# Altium PCB ToneReal_Adapter_LUT.PcbDoc
Units mm, origin at the board's own origin, x right, y up, seen from the top; angles counter-clockwise.
Board outline 83.5 x 27 mm, 2 copper layers (Top Layer, Bottom Layer); 49 components, 24 nets, 163 pads, 10 vias.
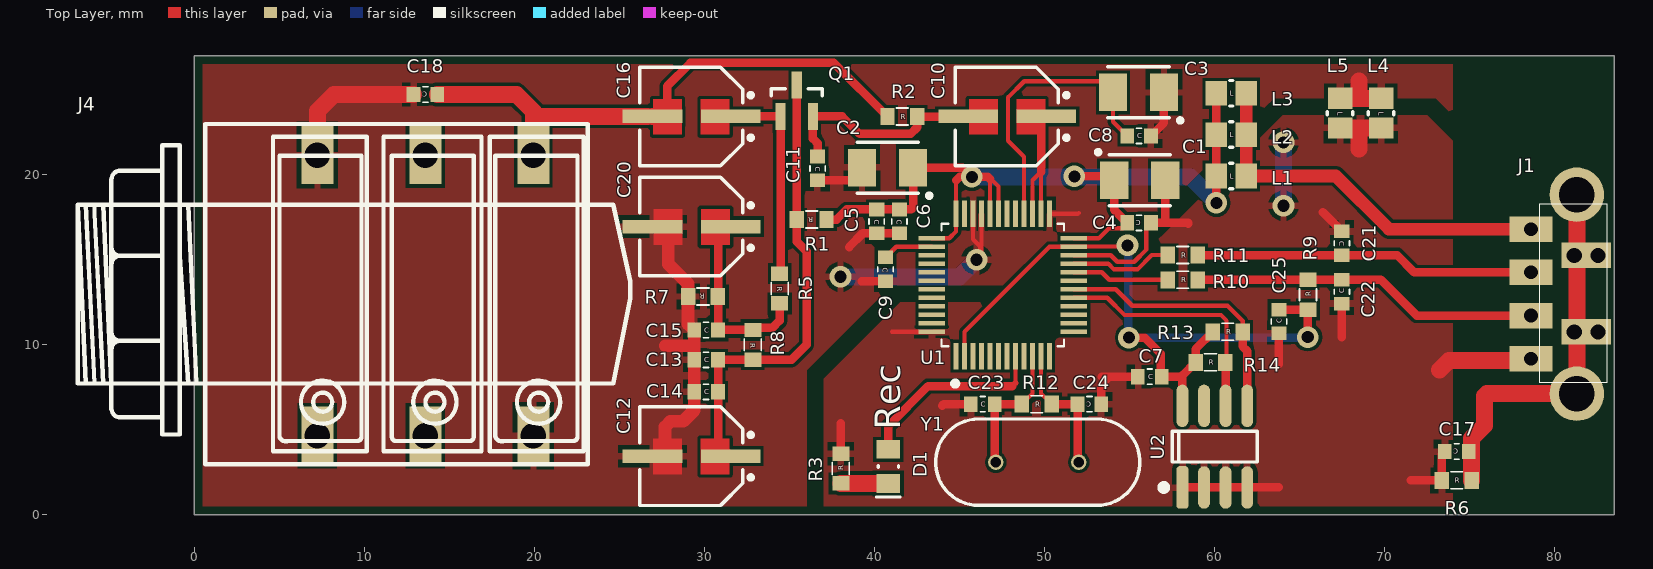
[diagram p0: Top Layer view]
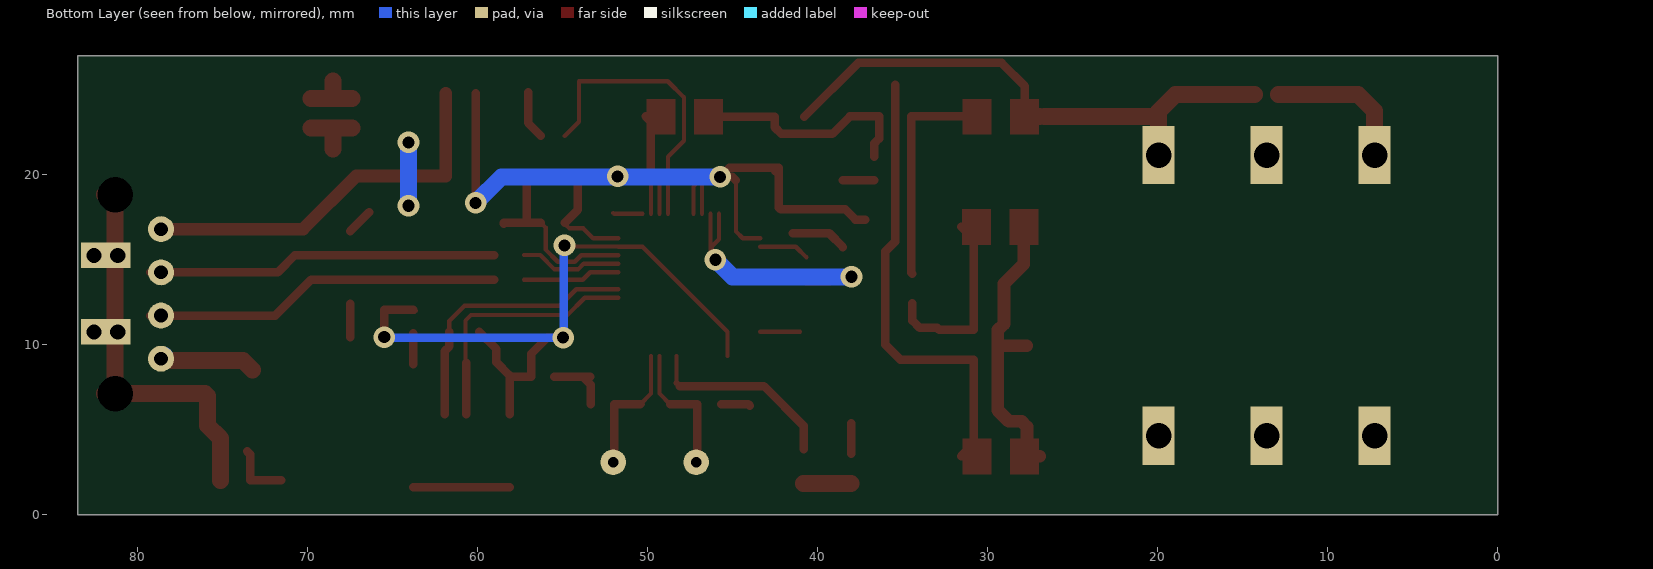
[diagram p1: Bottom Layer view, seen from below]

## Layer stack, top to bottom
Top Solder: solder mask 0.0102, Solder Resist, Dk 3.5
Top Layer: signal copper 0.0356
Dielectric1: dielectric 0.32, FR-4, Dk 4.8
Bottom Layer: signal copper 0.0356
Bottom Solder: solder mask 0.0102, Solder Resist, Dk 3.5

## Board outline
0,0 83.5,0 83.5,27 0,27

## Design rules (kind name [scope] priority, off if disabled: settings)
Clearance Clearance_1 [(IsRegion) vs (IsText)] p1: gap=0 ignorepadtopadclearanceinfootprint=FALSE
Clearance [All] p2: gap=0.2 ignorepadtopadclearanceinfootprint=FALSE except(0: Arc-Hole Track-Hole SMDPad-Hole THPad-Hole Via-Hole Fill-Hole Poly-Hole Region-Hole Text-Hole)
ComponentClearance [NOT(InComponent('J1') or InComponent('J2')) vs NOT(InComponent('J1') or InComponent('J2'))] p1: gap=0.254 collisioncheckmode=3 verticalgap=0.254 showdistances=FALSE
HoleSize [All] p1: absolutevalues=TRUE maxlimit=5 minlimit=0.025 maxpercent=80.000 minpercent=20.000
MinimumSolderMaskSliver [All] p1: minsoldermaskwidth=0.01
PlaneConnect [All] p1: planeconnectstyle=Relief reliefexpansion=0.508 reliefentries=4 reliefconductorwidth=0.4 reliefairgap=0.2
PolygonConnect [All] p1: connectstyle=Relief reliefconductorwidth=0.4 reliefentries=4 polygonreliefangle="90 Angle" airgapwidth=0.254
RoutingVias [All] p1: holewidth=0.711 width=1.27 viastyle="Through Hole" minholewidth=0.4 minwidth=0.8 maxholewidth=0.711 maxwidth=1.27
SilkToSilkClearance [All] p1: silktosilkclearance=0.054
SilkToSolderMaskClearance SilkscreenOverComponentPads [NOT(InComponent('J4'))] p1: minsilkscreentomaskgap=0.05 clearancetoexposedcopper=TRUE
SolderMaskExpansion [All] p1: expansion=0.102 istentingtop=FALSE
Width [All] p1: maxlimit=1 minlimit=0.2 preferedwidth=0.5 minimp=50.000000 maximp=50.000000 favimp=50.000000
24 further rules are at their usual default settings.

## Components (designator, comment, footprint, x,y, rotation, side; value= is the part's Value field where it differs from the comment)
C1 "10uF/16V" "TECAP SMD_B (IPC-3528)" 55.596,19.678 r0 top
C2 "10uF/16V" "TECAP SMD_B (IPC-3528)" 40.767,20.42 r180 top
C3 "10uF/16V" "TECAP SMD_B (IPC-3528)" 55.521,24.84 r180 top
C4 "?" "CERCAP SMD0603L (IPC1608L)" 55.559,17.168 r180 top
C5 "1uF" "CERCAP SMD0603L (IPC1608L)" 40.123,17.256 r270 top
C6 "100pF" "CERCAP SMD0603L (IPC1608L)" 41.463,17.256 r270 top
C7 "1uF" "CERCAP SMD0603L (IPC1608L)" 56.189,8.127 r0 top
C8 "1uF" "CERCAP SMD0603L (IPC1608L)" 55.558,22.282 r0 top
C9 "1uF" "CERCAP SMD0603L (IPC1608L)" 40.646,14.442 r270 top
C10 "1uF/50V" "ECAP SMD KVE 5.0x5.3" 47.805,23.429 r180 top
C11 "100pF" "CERCAP SMD0603L (IPC1608L)" 36.65,20.37 r270 top
C12 "47uF/6.3V" "ECAP SMD KVE 5.0x5.3" 29.244,3.451 r180 top
C13 "100pF" "CERCAP SMD0603L (IPC1608L)" 30.098,9.121 r0 top
C14 "1uF" "CERCAP SMD0603L (IPC1608L)" 30.098,7.234 r0 top
C15 "1uF" "CERCAP SMD0603L (IPC1608L)" 30.098,10.871 r0 top
C16 "4.7uF/25V" "ECAP SMD KVE 5.0x5.3" 29.244,23.429 r180 top
C17 "4.7nF" "CERCAP SMD0603L (IPC1608L)" 74.23,3.726 r180 top
C18 "100pF" "CERCAP SMD0603L (IPC1608L)" 13.592,24.718 r180 top
C20 "22uF/6.3V" "ECAP SMD KVE 5.0x5.3" 29.244,16.949 r180 top
C21 "100pF" "CERCAP SMD0603L (IPC1608L)" 67.482,15.976 r270 top
C22 "100pF" "CERCAP SMD0603L (IPC1608L)" 67.482,13.122 r90 top
C23 "20pF" "CERCAP SMD0603L (IPC1608L)" 46.358,6.51 r0 top
C24 "20pF" "CERCAP SMD0603L (IPC1608L)" 52.638,6.51 r180 top
C25 "100pF" "CERCAP SMD0603L (IPC1608L)" 63.782,11.372 r90 top
D1 "PLAY/REC" SMDLED_0805 40.81,2.85 r90 top
J1 "USB_A" USBA_1PLAG 78.599,16.8 r270 top
J4 "JACK6.3_MONO_R" JACK6.3 13.592,12.903 r90 top
L1 "BLM21PG221SN1" "BLM21P (0805 size)" 60.976,22.359 r0 top
L2 "BLM21PG221SN1" "BLM21P (0805 size)" 60.976,19.928 r0 top
L3 "BLM21PG221SN1" "BLM21P (0805 size)" 60.976,24.79 r0 top
L4 "BLM21PG221SN1" "BLM21P (0805 size)" 69.788,23.618 r270 top
L5 "BLM21PG221SN1" "BLM21P (0805 size)" 67.38,23.618 r270 top
Q1 "BC846B/BC850" SOT_23 35.426,24.354 r90 top
R1 "150" "RES smd0603 (IPC-1608)" 36.301,17.364 r180 top
R2 "680" "RES smd0603 (IPC-1608)" 41.639,23.419 r0 top
R3 "1k" "RES smd0603 (IPC-1608)" 38.016,2.725 r90 top (schematic designator R6)
R5 "100k" "RES smd0603 (IPC-1608)" 34.42,13.31 r270 top
R6 "1MOm" "RES smd0603 (IPC-1608)" 74.23,2.032 r0 top (schematic designator R4)
R7 "100k" "RES smd0603 (IPC-1608)" 29.914,12.839 r180 top
R8 "51k3" "RES smd0603 (IPC-1608)" 32.84,9.996 r270 top
R9 "1k5" "RES smd0603 (IPC-1608)" 65.492,12.947 r90 top
R10 "22" "RES smd0603 (IPC-1608)" 58.128,13.822 r0 top
R11 "22" "RES smd0603 (IPC-1608)" 58.128,15.276 r0 top
R12 "1M" "RES smd0603 (IPC-1608)" 49.538,6.51 r0 top
R13 "2k2" "RES smd0603 (IPC-1608)" 60.772,10.766 r0 top
R14 "2k2" "RES smd0603 (IPC-1608)" 59.756,8.972 r0 top
U1 "CM6327A" QFP50P900X900X160-48N 47.541,13.518 r90 top
U2 "24C02" SOIC-8 60.01,4.011 r90 top
Y1 "12MHz" "HC-49/U3H  (KX-3H)" 49.573,3.096 r180 top

## Footprints (in the part's own frame and the unit in brackets; to place one, negate y for a bottom-side part, rotate by r counter-clockwise, add the part's x,y. Pads: shape width x height; smd on the part's side, far side on the other; paste and mask are expansions set on the pad)
"BLM21P (0805 size)" [mm] "BLM21P (0805 size), 2-Leads, Body 2,0x1,3mm, IPC Medium Density"
  rect 1.25x1.45 smd: 1(-0.875,0) 2(0.875,0)
  silkscreen extent -0.1,-0.75 0.1,0.75, body extent -1,-0.63 1,0.63, height 0.85
"CERCAP SMD0603L (IPC1608L)" [mm] "Chip Capacitor, Body 1.6x0.8mm, IPC High Density"
  rect 0.8x0.9 smd: 1(-0.7,0) 2(0.7,0)
  silkscreen extent -0.15,-0.45 0.15,0.45, body extent -0.8,-0.4 0.8,0.4, height 0.9
"ECAP SMD KVE 5.0x5.3" [mm] "Alumin Capacitor, 2-Leads, Body 5.0x5.3mm, IPC Medium Density size C"
  rect 3.5x0.8 smd: 1(-2.3,0) 2(2.3,0)
  silkscreen extent -3.6,-2.9 3.05,2.9, body extent -2.77,-2.65 3.13,2.65, height 5.41
"HC-49/U3H  (KX-3H)" [mm] "QUARTZ CRYSTALS HC-49/U3H (low profile)"
  round 0.9 / inner round 1.5 / far side round 1.5 hole 0.6: 1(-2.44,0) 2(2.44,0)
  silkscreen extent -6.03,-2.54 5.98,2.54, body extent -6.08,-2.54 5.97,2.54, height 3.5
JACK6.3 [mil]
  rect 134.6x74.8 hole 59: 1(-325,250) 2(-325,0) 3(-325,-250) 4(325,250) 5(325,0) 6(325,-250)
  silkscreen extent -391,-474 397,805
QFP50P900X900X160-48N [mm]
  rect 1.56x0.28 smd: 1(-4.18,2.75) 2(-4.18,2.25) 3(-4.18,1.75) 4(-4.18,1.25) 5(-4.18,0.75) 6(-4.18,0.25) 7(-4.18,-0.25) 8(-4.18,-0.75) 9(-4.18,-1.25) 10(-4.18,-1.75) 11(-4.18,-2.25) 12(-4.18,-2.75) 25(4.18,-2.75) 26(4.18,-2.25) 27(4.18,-1.75) 28(4.18,-1.25) 29(4.18,-0.75) 30(4.18,-0.25) 31(4.18,0.25) 32(4.18,0.75) 33(4.18,1.25) 34(4.18,1.75) 35(4.18,2.25) 36(4.18,2.75)
  rect 0.28x1.56 smd: 13(-2.75,-4.18) 14(-2.25,-4.18) 15(-1.75,-4.18) 16(-1.25,-4.18) 17(-0.75,-4.18) 18(-0.25,-4.18) 19(0.25,-4.18) 20(0.75,-4.18) 21(1.25,-4.18) 22(1.75,-4.18) 23(2.25,-4.18) 24(2.75,-4.18) 37(2.75,4.18) 38(2.25,4.18) 39(1.75,4.18) 40(1.25,4.18) 41(0.75,4.18) 42(0.25,4.18) 43(-0.25,4.18) 44(-0.75,4.18) 45(-1.25,4.18) 46(-1.75,4.18) 47(-2.25,4.18) 48(-2.75,4.18)
  silkscreen extent -5.95,-3.6 3.6,3.6
"RES smd0603 (IPC-1608)" [mm] "Chip Resistor, 2-Leads, Body 1,6x0,8mm, IPC Medium Density"
  rect 0.85x1 smd: 1(-0.875,0) 2(0.875,0)
  silkscreen extent -0.35,-0.5 0.35,0.5, body extent -0.8,-0.45 0.8,0.45, height 0.5
SMDLED_0805 [mm]
  rect 1.1x1.4 smd: 1(-1,0) 2(1,0)
  silkscreen extent -1.8,-0.7 0.05,0.7, body extent -1,-0.6 1,0.65, height 0.81
SOIC-8 [mm] "MAX522,SN65HVD11DR"
  rrect50% 2.5x0.7 smd: 1(-2.4,1.905)
  oval 2.5x0.7 smd: 2(-2.4,0.635) 3(-2.4,-0.635) 4(-2.4,-1.905) 5(2.4,-1.905) 6(2.4,-0.635) 7(2.4,0.635) 8(2.4,1.905)
  silkscreen extent -2.52,-2.5 0.9,3.13, body extent -2.99,-2.44 3.01,2.46, height 1.75
SOT_23 [mm] "BC846, AZ23C5V1"
  rect 1.6x0.6 smd: 1(0.925,0) 2(-0.925,0.95) 3(-0.925,-0.95)
  silkscreen extent 0.3,-1.5 0.7,1.5, body extent -0.7,-1.5 0.7,1.5, height 1.1
"TECAP SMD_B (IPC-3528)" [mm] "Tantalium  Capacitor, 2-Leads, Body 3,5x2,8mm, IPC Medium Density"
  rect 1.65x2.2 smd: 1(-1.5,0) 2(1.5,0)
  silkscreen extent -2.57,-1.5 1.8,1.77, body extent -1.9,-1.45 1.95,1.45, height 1.95
USBA_1PLAG [mm]
  round 3.2 / inner round 1.524 / far side round 1.524 hole 2.1: 0(-2.025,2.7) 0(9.675,2.7)
  rect 1.5x2.54 / inner round 1.524 / far side round 1.524 hole 0.8: 1(0,0) 2(2.54,0) 3(5.08,0) 4(7.62,0)
  rect 1.499x1.499 hole 0.9: 7(1.549,2.548) 8(6.044,2.548) 9(1.549,3.946) 10(6.044,3.946)
  silkscreen extent -1.5,0.5 9,4.5, body extent -2.51,0.1 10.1,20.4, height 4.5

## Part data
C1 C2 C3 C4 C5 C6 C7 C8 C9 C11 C13 C14 C15 C17 C18 C21 C22 C23 C24 C25: library part "Cap Semi", "Capacitor (Semiconductor SIM Model)"
C10 C12 C16 C20: library part "Cap Pol3", "Polarized Capacitor (Surface Mount)"
D1: library part LED0, "Typical INFRARED GaAs LED"
J1: library part USB
L1 L2 L3 L4 L5: library part INDUCT
Q1: library part BC846B, "NPN Bipolar Transistor"
R1 R2 R3 R5 R6 R7 R8 R9 R10 R11 R12 R13 R14: library part RES, "Resistor"
U1: library part CM6327_1, "CM6327"
Y1: library part TSX-3225, "3225"

## Via types
v1: diameter 1.27, hole 0.711, Top Layer to Bottom Layer, 10 vias

## Nets (pads, with @x,y where several pads share a name; then routed paths per layer and width w, separated by ;. In a path a pad name is that pad's centre, name@x,y a point inside that pad or via, vN(x,y) a via of type N, cw(c..) or ccw(c..) an arc to the next point about the centre after c; other vN are vias at no path point)
AGND: C2.2 C3.1 C5.2 C6.2 C8.2 C9.2 C11.2 C12.2 C13.1 C14.1 C15.1 C18.2 C20.2 J4.3 J4.4 L4.1 L5.1 R7.2 U1.25 U1.33 U1.34 | length 53.5
  Top Layer w0.254: U1.34 45.791,16.209 46.222,15.778 v1@46.222,15.245 ; v1@46.222,15.222 v1@46.222,15.245 ; U1.33 46.291,15.314 v1@46.222,15.245 ; U1.25 51.948,17.698 52,17.75
  Top Layer w0.5: C11.2 C2.2@38.517,19.67 ; 38.5,15.75 39.306,16.556 C5.2 C6.2 ; 39.242,13.742 C9.2 ; C8.2 57.021,23.044 C3.1
  Top Layer w0.75: C12.2 27.675,3.451 27.675,5.175 28,5.5 28.75,5.5 29.398,6.148 C14.1 C13.1 C15.1 29.039,11.23 R7.2 29.039,13.586 27.875,14.75 27.875,16.018 ; 27.701,9.951 29.349,9.951
  Top Layer w1: J4.4 7.242,23.742 8.218,24.718 C18.2 ; L5.1 68.5,24.493 ; 68.5,25.5 68.5,24.493 ; L4.1 68.5,24.493
  Bottom Layer w1: v1(38,14) 45,14 v1(46,15)
D+: C22.2 J1.3 R9.2 R10.2 | length 21.1
  Top Layer w0.5: R10.2 R9.2 C22.2 69.778,13.822 71.88,11.72 J1.3 J1.3@79.224,11.72
D-: C21.2 J1.2 R11.2 | length 20.6
  Top Layer w0.5: R11.2 C21.2 70.724,15.276 71.74,14.26 J1.2 J1.2@79.224,14.26
GND: C1.2 C4.1 C7.1 C17.2 C21.1 C22.1 C23.1 C24.1 C25.1 J1.4 L4.2 L5.2 R3.2 R6.1 U1.22 U1.48 U2.1 U2.2 U2.3 U2.4 | length 48.9
  Top Layer w0.254: 41.025,10.775 41.032,10.768 U1.48 ; U1.22 53.893,15.268 54.273,14.888 55.273,14.888 55.985,15.6 55.985,16.895 C4.1
  Top Layer w0.5: R3.2 38.016,5.384 ; 43.978,6.43 44.058,6.51 C23.1 ; C24.1 53.338,7.663 53.802,8.127 ; 53.373,8.127 53.802,8.127 ; C7.1 53.802,8.127 ; C4.1 57.096,17.168 ; 57.096,17.175 57.096,17.168 ; C1.2 57.096,17.168 ; U2.1 U2.3 U2.4 63.764,1.611 ; 58.454,17.106 58.454,17.168 57.096,17.168 ; 63.782,8.843 C25.1 ; 66.358,17.8 C21.1 ; 67.482,10.457 C22.1 ; 71.532,2.032 R6.1 73.355,3.551 C17.2
  Top Layer w1: v1(64.05,18.175) v1@64.1,18.175 ; L5.2 68.5,22.743 ; 68.5,21.5 68.5,22.743 ; L4.2 68.5,22.743 ; 73.225,8.525 73.775,9.075 78.494,9.075 J1.4
  Bottom Layer w1: v1(64.05,18.175) v1(64.05,21.9) ; J1.4@78.404,9.375 J1.4
INPUT+: C16.2 C18.1 J4.6 R2.1 | length 32.3
  Top Layer w0.5: C16.2@27.8,23.429 27.8,25.2 29.179,26.579 37.604,26.579 R2.1
  Top Layer w1: C18.1 18.942,24.718 19.942,23.718 J4.6 ; 20.429,23.429 C16.2@26.652,23.429 ; C16.2 C16.2@27.8,23.429
NetC3_2: C3.2 C8.1 U1.28 | length 17.4
  Top Layer w0.254: U1.28 48.791,21.059 47.85,22 47.85,24.55 48.8,25.5 54.021,25.5 C3.2 54.021,23.119 C8.1
NetC9_1: C9.1 U1.38 | length 3
  Top Layer w0.254: C9.1 41.272,15.768 U1.38
NetC10_1: C10.1 U1.26 U1.27 | length 8.5
  Top Layer w0.254: U1.27 49.291,19.675 49.791,20.175 U1.26
  Top Layer w0.5: 49.791,20.175 49.791,23.115 C10.1
NetC10_2: C10.2 C11.1 Q1.3 R2.2 | length 12.8
  Top Layer w0.5: C11.1 36.65,21.85 36.376,22.124 Q1.3 38.096,23.429 39.125,22.4 42.125,22.4 42.514,22.789 R2.2 C10.2@45.495,23.419
NetC12_1: C12.1 C13.2 C14.2 Q1.1 R1.2 R8.2 | length 27.1
  Top Layer w0.5: C12.1 30.8,4.195 30.8,6.2 30.798,6.202 C14.2 C13.2 R8.2 35.121,9.121 36,10 36,15.5 35.426,16.074 R1.2 Q1.1
NetC15_2: C15.2 C20.1 R5.2 R7.1 R8.1 | length 11.3
  Top Layer w0.5: C20.1 30.8,16.205 30.8,14.3 30.798,14.298 30.798,12.839 C15.2 R8.1 32.969,11 34,11 34.42,11.42 R5.2
NetC16_1: C16.1 Q1.2 R5.1 | length 12.6
  Top Layer w0.5: C16.1@31.252,23.429 C16.1 Q1.2 ; R5.1 34.476,14.241 Q1.2 ; Q1.2@34.42,23.373 Q1.2
NetD1_1: D1.1 R3.1 | length 2.8
  Top Layer w1: R3.1 D1.1
NetD1_2: D1.2 U1.8 | length 11.5
  Top Layer w0.254: 48.291,7.766 U1.8
  Top Layer w0.35: 48.1,7.575 48.291,7.766
  Top Layer w0.5: D1.2 40.81,5.235 43.15,7.575 48.1,7.575
NetR10_1: R10.1 U1.20 | length 5.7
  Top Layer w0.254: U1.20 53.357,14.268 53.803,13.822 R10.1
NetR11_1: R11.1 U1.21 | length 6
  Top Layer w0.254: U1.21 53.751,14.768 54.085,14.434 55.462,14.434 56.304,15.276 R11.1
SCL: R14.2 U1.17 U2.6 | length 15.1
  Top Layer w0.254: U1.17 52.674,12.768 53.682,12.768 54.7,11.75 60.371,11.75 60.699,11.422 60.699,9.04 R14.2
  Top Layer w0.5: U2.6@60.645,5.911 U2.6 R14.2@60.645,8.958
SDA: R13.2 U1.18 U2.5 | length 16.3
  Top Layer w0.254: U1.18 54.182,13.268 55.15,12.3 60.75,12.3 61.647,11.403 R13.2
  Top Layer w0.5: R13.2 61.647,9.903 61.915,9.635 U2.5 U2.5@61.915,5.911
SHIELD: C17.1 J1.0 J1.7 J1.8 J1.9 J1.10 R6.2 | length 23.7
  Top Layer w1: R6.2 75.105,4.5 75.864,5.259 75.864,6.975 76.014,7.125 J1.0@81.299,7.125 ; J1.0@81.924,7.125 J1.0@81.299,7.125 ; J1.0@81.924,18.825 81.299,18.825 81.299,15.252 81.299,10.756 J1.0@81.299,7.125
VDD3.3V: C7.2 C25.2 R9.1 R13.1 R14.1 U1.2 U1.23 U2.8 | length 43
  Top Layer w0.254: U1.2 45.291,10.766 50.293,15.768 U1.23 51.734,15.781 54.806,15.781 v1(54.875,15.85) ; 58.036,8.127 58.105,8.196 ; C25.2@63.619,11.999 C25.2@63.692,11.927
  Top Layer w0.5: v1(54.954,10.425) 55.879,10.425 56.84,9.464 56.84,8.127 C7.2 58.036,8.127 ; U2.8@58.105,5.911 U2.8 58.105,8.196 R14.1 58.881,9.75 R13.1 ; C25.2 65.475,12.072 v1(65.475,10.45)
  Bottom Layer w0.5: v1(54.875,15.85) 54.914,15.811 54.914,10.464 v1(54.954,10.425) v1@65.45,10.425
VDD5V: C1.1 C2.1 C4.2 C5.1 C6.1 L1.1 L2.1 L3.1 R1.1 U1.24 U1.31 U1.32 U1.36 U1.37 | length 53.2
  Top Layer w0.254: U1.37 44.393,16.268 44.791,16.666 U1.36 44.791,19.666 ; U1.32 46.791,19.741 46.825,19.775 47.291,19.309 U1.31 ; U1.24 53.191,16.268 53.768,16.845 54.585,16.845 54.859,17.118 C4.2
  Top Layer w0.5: R1.1 37.764,17.364 38.356,17.956 C5.1 C6.1 42.156,17.956 42.267,18.067 C2.1 ; C2.1@42.475,20.212 C2.1 ; 44.791,19.666 45,19.875 v1(45.725,19.875) ; 46.791,19.741 46.657,19.875 v1(45.725,19.875) ; v1(51.75,19.9) 54.074,19.9 54.096,19.878 C1.1 54.096,17.931 C4.2 ; v1(60.101,18.349) L2.1 L1.1 L3.1 ; C2.1 45.18,20.42 v1(45.725,19.875)
  Bottom Layer w1: v1(45.725,19.875) 51.75,19.875 58.575,19.875 v1(60.101,18.349)
VUSB: J1.1 L1.2 L2.2 L3.2 | length 22.9
  Top Layer w0.75: L3.2 L1.2 L2.2 67.122,19.928 70.25,16.8 J1.1
XTAL_I: C23.2 R12.1 U1.10 Y1.2 | length 8.1
  Top Layer w0.254: R12.1 49.291,7.138 U1.10
  Top Layer w0.5: Y1.2@47.058,3.096 C23.2 R12.1
XTAL_O: C24.2 R12.2 U1.11 Y1.1 | length 8.2
  Top Layer w0.254: U1.11 49.791,7.132 R12.2 R12.2@50.283,6.51
  Top Layer w0.5: R12.2 C24.2 Y1.1@51.938,3.096
pads on no net: J4.1 J4.2 J4.5 U1.1 U1.3 U1.4 U1.5 U1.6 U1.7 U1.9 U1.12 U1.13 U1.14 U1.15 U1.16 U1.19 U1.29 U1.30 U1.35 U1.39 U1.40 U1.41 U1.42 U1.43 U1.44 U1.45 U1.46 U1.47 U2.7

## Polygon pours and split planes (outlines as drawn)
GND on Top Layer "GND" (solid, remove dead copper, pour order 1000): 37,0.5 37,8 41,12 41.5,12.5 55,12.5 55,14.5 57,16.5 64,23.5 72.5,23.5 73,23 74,22 74,0.5 37,0.5
AGND on Top Layer "AGND" (solid, remove dead copper, pour order 1001): 36,0.5 0.5,0.5 0.5,26.5 74,26.5 74,23.5 73,24.5 66,24.5 63.5,24.5 54,15 54,13.5 41,13.5 36,8.5 36,6 36,0.5

## Other copper
Top Layer:
  rectangle net NetC10_1: 48.35,22.354 50.05,24.454
  rectangle net NetC10_2: 45.55,22.354 47.25,24.454
  rectangle net AGND: 26.975,2.379 28.675,4.479
  rectangle net NetC12_1: 29.775,2.379 31.475,4.479
  rectangle net NetC15_2: 29.8,15.879 31.5,17.979
  rectangle net AGND: 27,15.879 28.7,17.979
  rectangle net NetC16_1: 29.775,22.354 31.475,24.454
  rectangle net INPUT+: 26.975,22.354 28.675,24.454

## Silkscreen, mask and mechanical layers (free items; w line width, h text height)
Top Overlay:
  text "Rec" at 41.5,5 h1.5 r90
Mechanical 3:
  the board outline again, w0.5

## Text inside footprints (layer, text, board x,y; h text height)
C4: Top Overlay "C" at 55.659,17.318 h0.3 r180
C5: Top Overlay "C" at 39.973,17.356 h0.3 r270
C6: Top Overlay "C" at 41.313,17.356 h0.3 r270
C7: Top Overlay "C" at 56.089,7.977 h0.3
C8: Top Overlay "C" at 55.458,22.132 h0.3
C9: Top Overlay "C" at 40.496,14.542 h0.3 r270
C11: Top Overlay "C" at 36.5,20.47 h0.3 r270
C13: Top Overlay "C" at 29.998,8.971 h0.3
C14: Top Overlay "C" at 29.998,7.084 h0.3
C15: Top Overlay "C" at 29.998,10.721 h0.3
C17: Top Overlay "C" at 74.33,3.876 h0.3 r180
C18: Top Overlay "C" at 13.692,24.868 h0.3 r180
C21: Top Overlay "C" at 67.332,16.076 h0.3 r270
C22: Top Overlay "C" at 67.632,13.022 h0.3 r90
C23: Top Overlay "C" at 46.258,6.36 h0.3
C24: Top Overlay "C" at 52.738,6.66 h0.3 r180
C25: Top Overlay "C" at 63.932,11.272 h0.3 r90
L1: Top Overlay "L" at 60.876,22.209 h0.3
L2: Top Overlay "L" at 60.876,19.778 h0.3
L3: Top Overlay "L" at 60.876,24.64 h0.3
L4: Top Overlay "L" at 69.638,23.718 h0.3 r270
L5: Top Overlay "L" at 67.23,23.718 h0.3 r270
R1: Top Overlay "R" at 36.401,17.514 h0.3 r180
R2: Top Overlay "R" at 41.539,23.269 h0.3
R3: Top Overlay "R" at 38.166,2.625 h0.3 r90
R5: Top Overlay "R" at 34.27,13.41 h0.3 r270
R6: Top Overlay "R" at 74.13,1.882 h0.3
R7: Top Overlay "R" at 30.014,12.989 h0.3 r180
R8: Top Overlay "R" at 32.69,10.096 h0.3 r270
R9: Top Overlay "R" at 65.642,12.847 h0.3 r90
R10: Top Overlay "R" at 58.028,13.672 h0.3
R11: Top Overlay "R" at 58.028,15.126 h0.3
R12: Top Overlay "R" at 49.438,6.36 h0.3
R13: Top Overlay "R" at 60.672,10.616 h0.3
R14: Top Overlay "R" at 59.656,8.822 h0.3